# EAGLE board HeaderConnectorBoard (EAGLE 7.6.0)
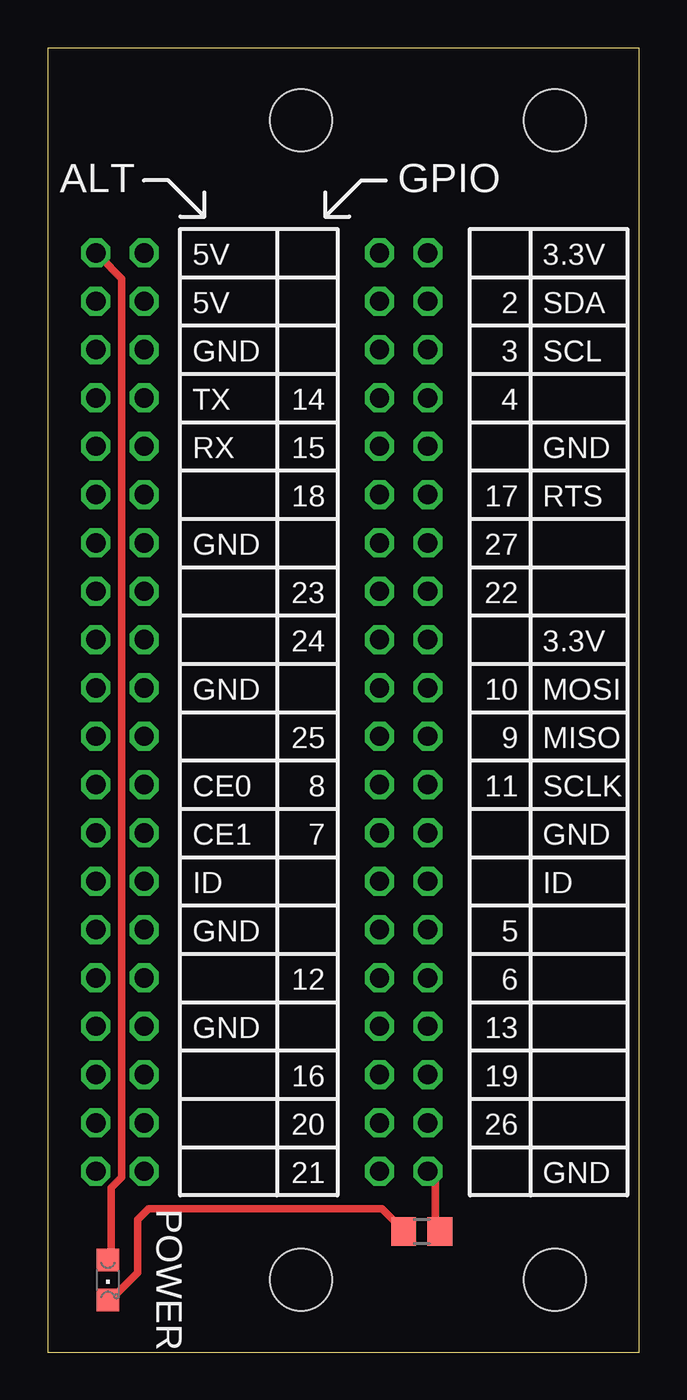
[diagram p0: board, top side]
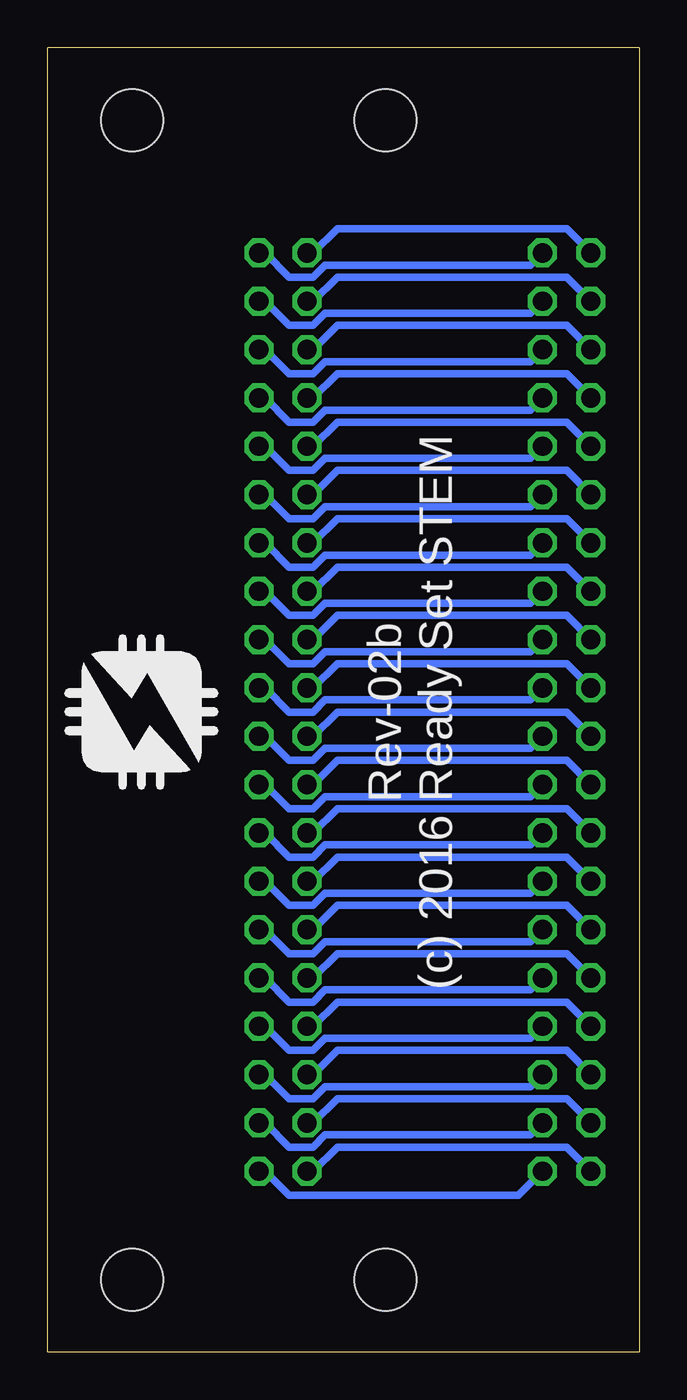
[diagram p1: board, bottom side, seen from below]

Size 31.11 x 68.58 mm. Coordinates in mm from the lower left corner, seen from the top.
Outline: 31.11,68.57 31.11,0 0,0 0,68.57
Outline: 0,68.58 31.11,68.58
Copper layers (1*16): Top 0.0356mm / dielectric 1.5011mm / Bottom 0.0356mm
Design rules "LaenPCBOrder *": minimum track width 16mil, minimum drill 13mil, track to track 6mil, track to pad 6mil, pad to pad 6mil, via to via 6mil, smd to smd 6mil, copper to edge 15mil, drill to drill 6mil, minimum pad ring 7mil, minimum via ring 7mil, stop-mask expansion 3mil, vias tented up to drill 0mil, thermal gap 10mil
Holes 3.26 mm at 13.34,3.81 26.67,3.81 13.34,64.77 26.67,64.77
tRestrict: area 10.2,0.6 to 16.5,7; area 23.4,0.6 to 29.9,7; area 5.1,0.6 to 7.6,7

## Footprints (pad centres in the part's own frame; a part is rotated, then mirrored left to right if it is on the bottom)
2X20 = drill 1.016 octagon: 1 -24.13,-1.27; 2 -24.13,1.27; 3 -21.59,-1.27; 4 -21.59,1.27; 5 -19.05,-1.27; 6 -19.05,1.27; 7 -16.51,-1.27; 8 -16.51,1.27; 9 -13.97,-1.27; 10 -13.97,1.27; 11 -11.43,-1.27; 12 -11.43,1.27; 13 -8.89,-1.27; 14 -8.89,1.27; 15 -6.35,-1.27; 16 -6.35,1.27; 17 -3.81,-1.27; 18 -3.81,1.27; 19 -1.27,-1.27; 20 -1.27,1.27; 21 1.27,-1.27; 22 1.27,1.27; 23 3.81,-1.27; 24 3.81,1.27; 25 6.35,-1.27; 26 6.35,1.27; 27 8.89,-1.27; 28 8.89,1.27; 29 11.43,-1.27; 30 11.43,1.27; 31 13.97,-1.27; 32 13.97,1.27; 33 16.51,-1.27; 34 16.51,1.27; 35 19.05,-1.27; 36 19.05,1.27; 37 21.59,-1.27; 38 21.59,1.27; 39 24.13,-1.27; 40 24.13,1.27
CHIPLED_0805 = smd 1.2 x 1.2: A 0,-1.05; C 0,1.05
R0805 = smd 1.3 x 1.5: 1 -0.95,0; 2 0.95,0

## Placement (x,y rotation side)
JP1  NONE  [2X20]  18.73,33.66 270 top
JP2  NONE  [2X20]  3.81,33.66 270 top
LED1  475-1410-2-ND  [CHIPLED_0805]  3.17,3.81 180 top
R1  200  [R0805]  19.68,6.35 180 top

## Library data of the parts
JP1 JP2 = HeaderConnectorBoard
LED1 = led
R1 = resistor

## Nets
2/SDA: JP1.4 JP2.4
3.3V_1: JP1.2 JP2.2
3.3V_2: JP1.18 JP2.18
3/SCL: JP1.6 JP2.6
4: JP1.8 JP2.8
5: JP1.30 JP2.30
5V_1: JP1.3 JP2.3
5V_2: JP1.1 JP2.1 LED1.A
6: JP1.32 JP2.32
7/CE1: JP1.25 JP2.25
8/CE0: JP1.23 JP2.23
9/MISO: JP1.22 JP2.22
10/MOSI: JP1.20 JP2.20
11/CLK: JP1.24 JP2.24
12: JP1.31 JP2.31
13: JP1.34 JP2.34
14/TX: JP1.7 JP2.7
15/RX: JP1.9 JP2.9
16: JP1.35 JP2.35
17/RTS: JP1.12 JP2.12
18: JP1.11 JP2.11
19: JP1.36 JP2.36
20: JP1.37 JP2.37
21: JP1.39 JP2.39
22: JP1.16 JP2.16
23: JP1.15 JP2.15
24: JP1.17 JP2.17
25: JP1.21 JP2.21
26: JP1.38 JP2.38
27: JP1.14 JP2.14
GND: JP1.10 JP2.10
GND2: JP1.26 JP2.26
GND3: JP1.19 JP2.19
GND4: JP1.13 JP2.13
GND5: JP1.5 JP2.5
GND6: JP1.40 JP2.40 R1.1
GND7: JP1.33 JP2.33
GND8: JP1.29 JP2.29
ID1: JP1.28 JP2.28
ID2: JP1.27 JP2.27
N$1: LED1.C R1.2

## Tracks (layer width: path | path; a pad name or v marks a point on that pad's centre or on a via)
2/SDA
  Bottom 0.406: JP2.4 5.71,54.61 16.51,54.61 17.14,53.98 18.41,53.98 19.68,55.24 JP1.4
3.3V_1
  Bottom 0.406: JP2.2 5.71,57.15 16.51,57.15 17.14,56.52 18.41,56.52 19.68,57.78 JP1.2
3.3V_2
  Bottom 0.406: JP2.18 5.71,36.83 16.51,36.83 17.14,36.2 18.41,36.2 19.68,37.47 JP1.18
3/SCL
  Bottom 0.406: JP2.6 5.71,52.07 16.51,52.07 17.14,51.44 18.41,51.44 19.68,52.7 JP1.6
4
  Bottom 0.406: JP2.8 5.71,49.53 16.51,49.53 17.14,48.9 18.41,48.9 19.68,50.16 JP1.8
5
  Bottom 0.406: JP2.30 5.71,21.59 16.51,21.59 17.14,20.95 18.41,20.95 19.68,22.23 JP1.30
5V_1
  Bottom 0.406: JP2.3 3.81,56.52 15.88,56.52 17.14,55.24 JP1.3
5V_2
  Top 0.406: LED1.A 3.35,5.03 3.35,8.66 3.91,9.22 3.91,56.44 2.79,57.56 JP2.1
  Bottom 0.406: JP2.1 3.81,59.05 15.88,59.05 17.14,57.78 JP1.1
6
  Bottom 0.406: JP2.32 5.71,19.05 16.51,19.05 17.14,18.41 18.41,18.41 19.68,19.68 JP1.32
7/CE1
  Bottom 0.406: JP2.25 3.81,28.57 15.88,28.57 17.14,27.3 17.32,27.38 JP1.25
8/CE0
  Bottom 0.406: JP2.23 3.81,31.11 15.88,31.11 17.14,29.84 JP1.23
9/MISO
  Bottom 0.406: JP2.22 5.71,31.75 16.51,31.75 17.14,31.11 18.41,31.11 19.68,32.38 JP1.22
10/MOSI
  Bottom 0.406: JP2.20 5.71,34.29 16.51,34.29 17.14,33.66 18.41,33.66 19.68,34.92 JP1.20
11/CLK
  Bottom 0.406: JP2.24 5.71,29.21 16.51,29.21 17.14,28.57 18.41,28.57 19.68,29.84 JP1.24
12
  Bottom 0.406: JP2.31 3.81,20.95 15.88,20.95 17.14,19.68 JP1.31
13
  Bottom 0.406: JP2.34 5.71,16.51 16.51,16.51 17.14,15.88 18.41,15.88 19.68,17.14 JP1.34
14/TX
  Bottom 0.406: JP2.7 3.81,51.44 15.88,51.44 17.14,50.16 JP1.7
15/RX
  Bottom 0.406: JP2.9 3.81,48.9 15.88,48.9 17.14,47.62 JP1.9
16
  Bottom 0.406: JP2.35 3.81,15.88 15.88,15.88 17.14,14.61 JP1.35
17/RTS
  Bottom 0.406: JP2.12 5.71,44.45 16.51,44.45 17.14,43.81 18.41,43.81 19.68,45.09 JP1.12
18
  Bottom 0.406: JP2.11 3.81,46.35 15.88,46.35 17.14,45.09 JP1.11
19
  Bottom 0.406: JP2.36 5.71,13.97 16.51,13.97 17.14,13.34 18.41,13.34 19.68,14.61 JP1.36
20
  Bottom 0.406: JP2.37 3.81,13.34 15.88,13.34 17.14,12.06 JP1.37
21
  Bottom 0.406: JP2.39 3.81,10.79 15.88,10.79 17.14,9.53 JP1.39
22
  Bottom 0.406: JP2.16 5.71,39.37 16.51,39.37 17.14,38.73 18.41,38.73 19.68,40.01 JP1.16
23
  Bottom 0.406: JP2.15 3.81,41.27 15.88,41.27 17.14,40.01 JP1.15
24
  Bottom 0.406: JP2.17 3.81,38.73 15.88,38.73 17.14,37.47 JP1.17
25
  Bottom 0.406: JP2.21 3.81,33.66 15.88,33.66 17.14,32.38 JP1.21
26
  Bottom 0.406: JP2.38 5.71,11.43 16.51,11.43 17.14,10.79 18.41,10.79 19.68,12.06 JP1.38
27
  Bottom 0.406: JP2.14 5.71,41.91 16.51,41.91 17.14,41.27 18.41,41.27 19.68,42.55 JP1.14
GND
  Bottom 0.406: JP2.10 5.71,46.99 16.51,46.99 17.14,46.35 18.41,46.35 19.68,47.62 JP1.10
GND2
  Bottom 0.406: JP2.26 5.71,26.67 16.51,26.67 17.14,26.04 18.41,26.04 19.68,27.3 JP1.26
GND3
  Bottom 0.406: JP2.19 3.81,36.2 15.88,36.2 17.14,34.92 JP1.19
GND4
  Bottom 0.406: JP2.13 3.81,43.81 15.88,43.81 17.14,42.55 JP1.13
GND5
  Bottom 0.406: JP2.5 3.81,53.98 15.88,53.98 17.14,52.7 JP1.5
GND6
  Top 0.406: R1.1 20.4,6.43 20.4,9.22 20.12,9.5 JP1.40
  Bottom 0.406: JP2.40 6.35,8.26 18.41,8.26 19.68,9.53 JP1.40
GND7
  Bottom 0.406: JP2.33 3.81,18.41 15.88,18.41 17.14,17.14 JP1.33
GND8
  Bottom 0.406: JP2.29 3.81,23.5 15.88,23.5 17.14,22.23 JP1.29
ID1
  Bottom 0.406: JP2.28 5.71,24.13 16.51,24.13 17.14,23.5 18.41,23.5 19.68,24.77 JP1.28
ID2
  Bottom 0.406: JP2.27 3.81,26.04 15.88,26.04 17.14,24.77 JP1.27
N$1
  Top 0.406: LED1.C 3.35,2.79 4.75,4.19 4.75,6.99 5.31,7.54 17.6,7.54 18.72,6.43 R1.2

## Text on the board
tPlace: ALT | GPIO | 5V | 3.3V | 5V | 2 | SDA | GND | 3 | SCL | TX | 14 | 4 | RX | 15 | GND | 18 | 17 | RTS | GND | 27 | 23 | 22 | 24 | 3.3V | GND | 10 | MOSI | 25 | 9 | MISO | CE0 | 8 | 11 | SCLK | CE1 | 7 | GND | ID | ID | GND | 5 | 12 | 6 | GND | 13 | 16 | 19 | 20 | 26 | 21 | GND | POWER
bPlace: Rev-02b / (c) 2016 Ready Set STEM